# Altium PCB STM32.PcbDoc (part 6 of 10)
Units mil, origin at the board's own origin, x right, y up, seen from the top; angles counter-clockwise.
Board outline 3925 x 3925 mil, 2 copper layers (Top Layer, Bottom Layer); 152 components, 142 nets, 670 pads, 189 vias.
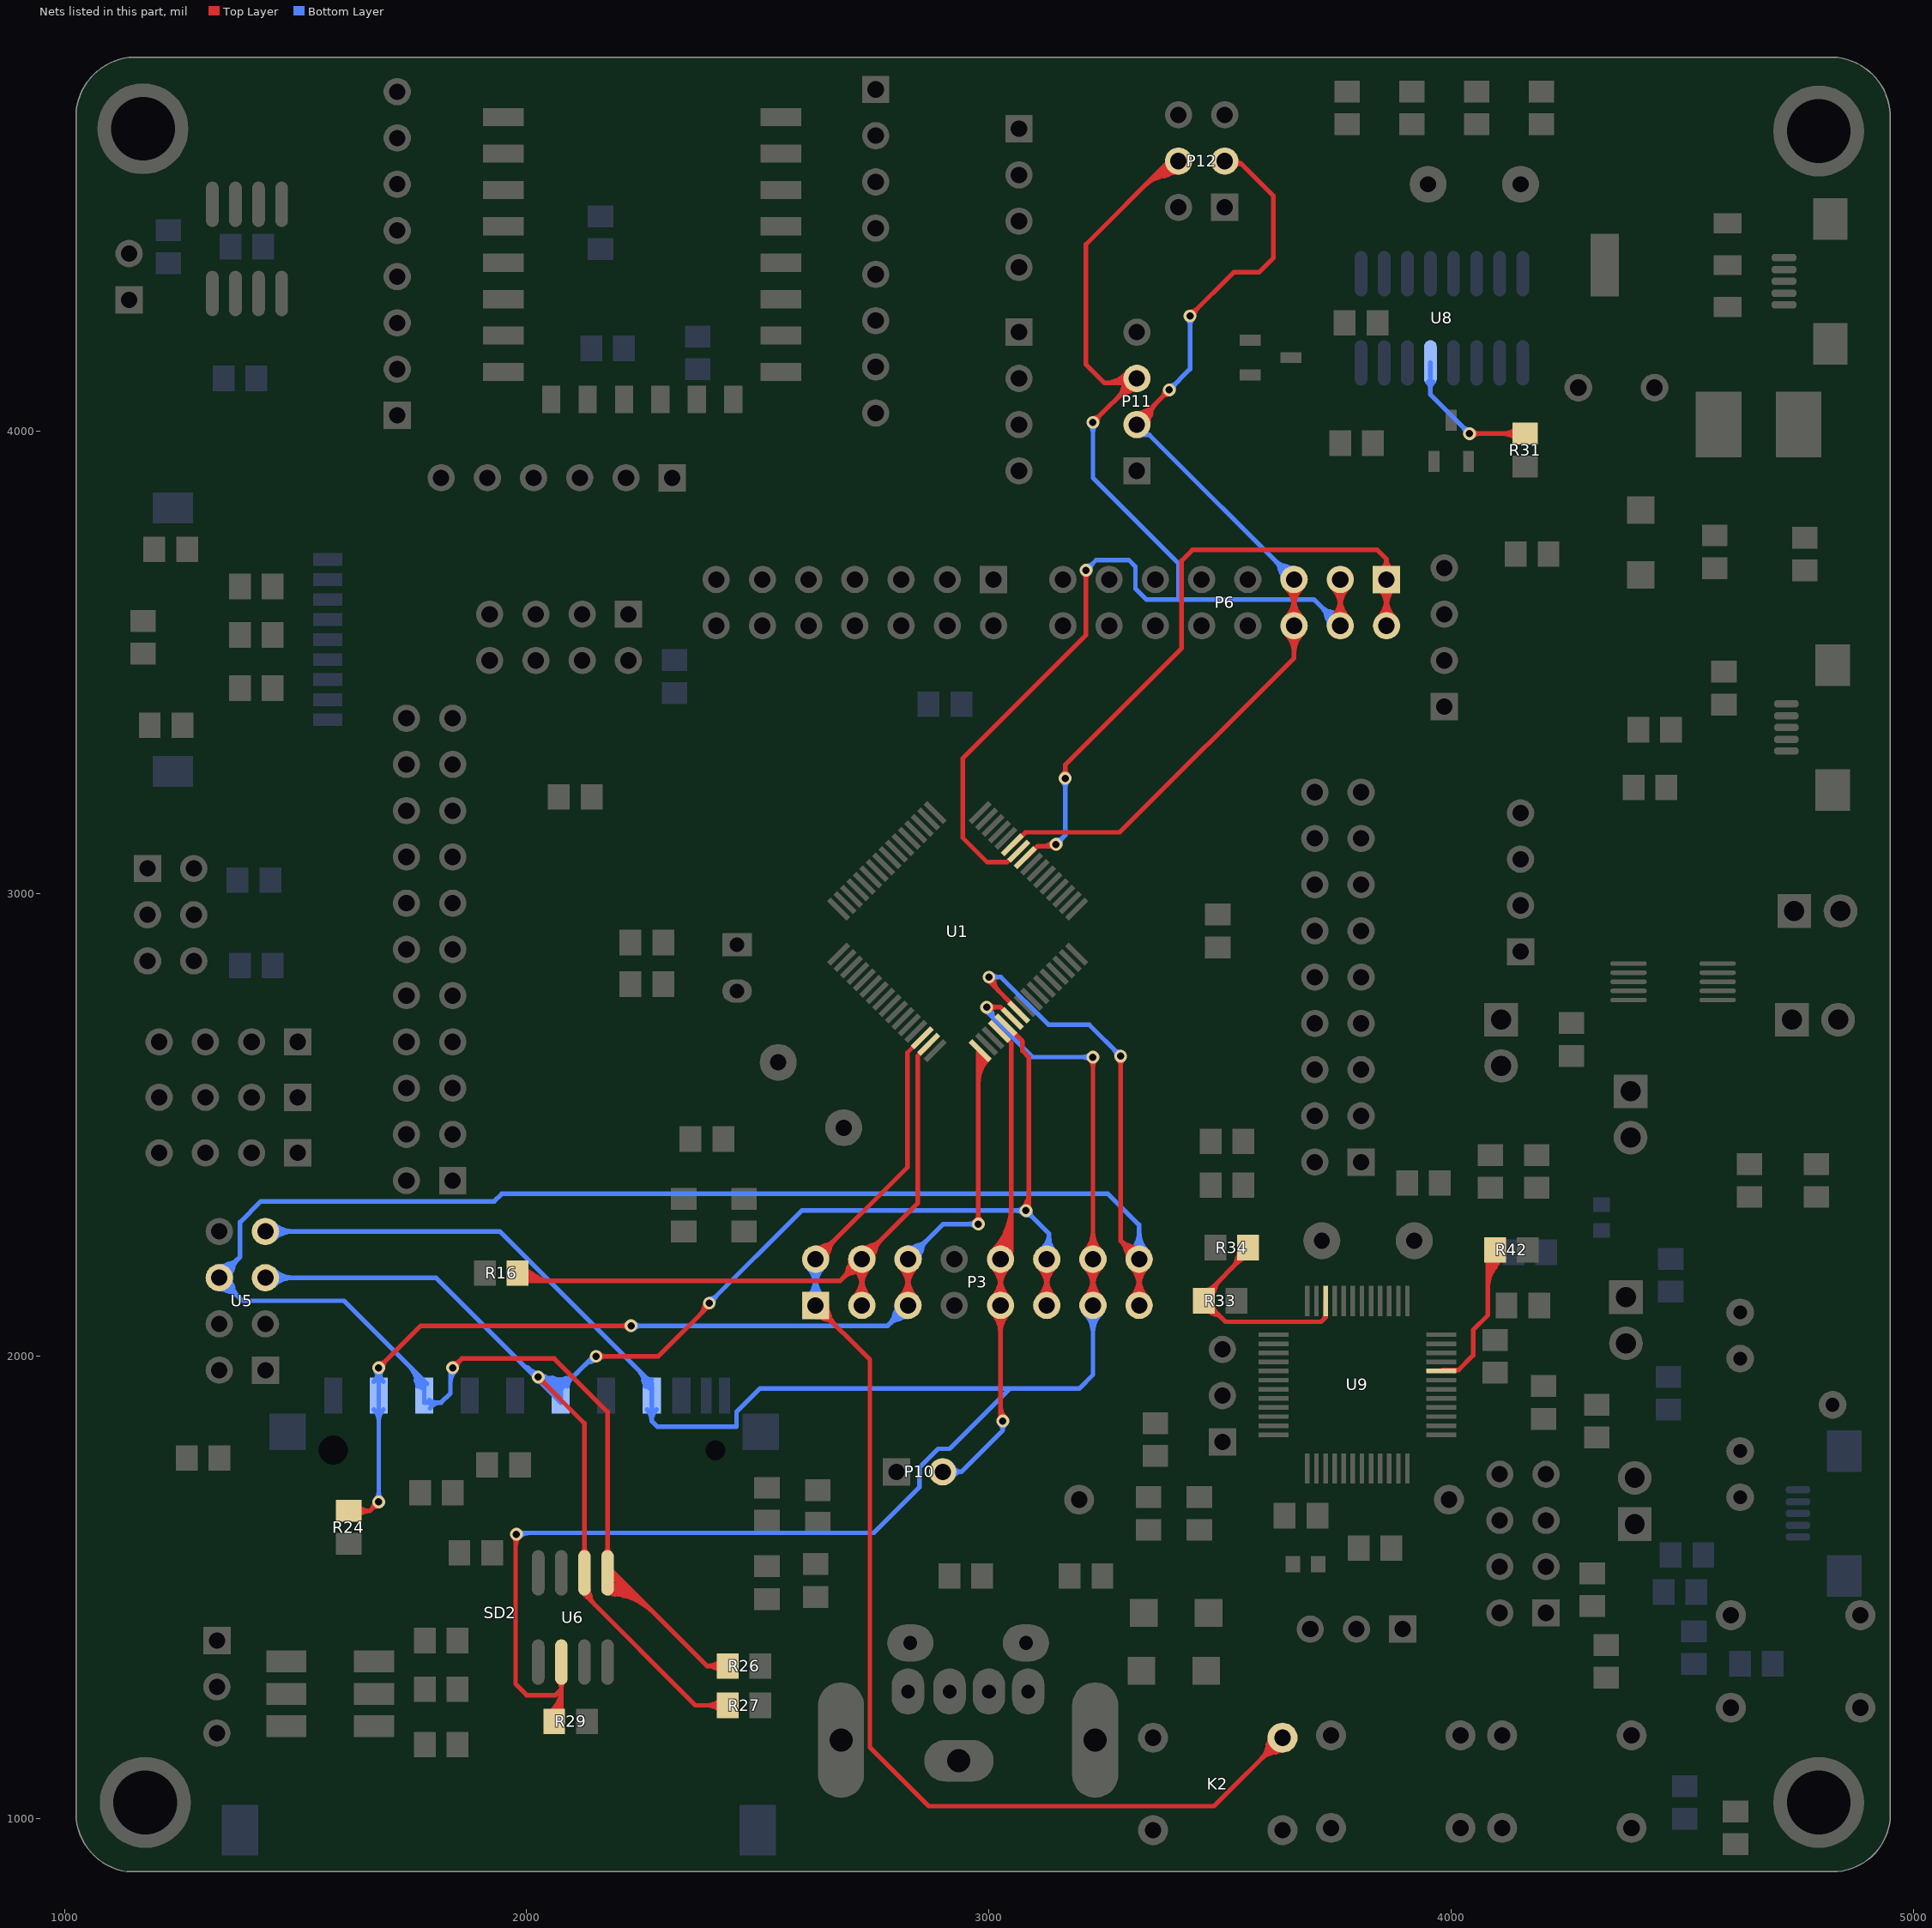
[diagram p6: the nets of this part, all layers, seen from the top]

## Via types
v1: diameter 27.56, hole 15.75, Top Layer to Bottom Layer, tented both sides, 185 vias
v2: diameter 39.37, hole 23.62, Top Layer to Bottom Layer, tented both sides, 3 vias
v3: diameter 39.37, hole 27.56, Top Layer to Bottom Layer, tented both sides, 1 vias

## Nets (pads, with @x,y where several pads share a name; then routed paths per layer and width w, separated by ;. In a path a pad name is that pad's centre, name@x,y a point inside that pad or via, vN(x,y) a via of type N, cw(c..) or ccw(c..) an arc to the next point about the centre after c; other vN are vias at no path point) (continued)
NetR31_2: R31.2 U8.13 | length 649.6
  Top Layer w10: v1(4039.57,3995.43) R31.2@4160,3995.43 ; 4060.76,3995.43 ccw(c4060.76,3974.24) 4045.77,3989.23 cw(c4060.76,3974.24) 4060.76,3995.43 ; 4060.76,3995.43 cw(c4060.76,4016.63) 4045.77,4001.64 ccw(c4060.76,4016.63) 4060.76,3995.43 ; 4111.11,3995.43 ccw(c4111.11,4040.39) 4142.9,4008.6 cw(c4111.11,4040.39) 4111.11,3995.43 ; 4111.11,3995.43 cw(c4111.11,3950.48) 4142.9,3982.27 ccw(c4111.11,3950.48) 4111.11,3995.43
  Bottom Layer w10: U8.13@3955,4148.54 3955,4080 v1(4039.57,3995.43) ; 3955,4091.92 ccw(c3933.8,4091.92) 3948.79,4106.9 cw(c3933.8,4091.92) 3955,4091.92 ; 3955,4091.92 cw(c3976.2,4091.92) 3961.21,4106.9 ccw(c3976.2,4091.92) 3955,4091.92 ; 4024.58,4010.42 ccw(c4039.57,4025.41) 4039.57,4004.21 cw(c4039.57,4025.41) 4024.58,4010.42 ; 4024.58,4010.42 cw(c4009.59,3995.43) 4030.79,3995.43 ccw(c4009.59,3995.43) 4024.58,4010.42
NetR33_1: R33.1 R34.2 U9.10 | length 1205.7
  Top Layer w10: R33.1@3463.25,2115.65 ccw(c3498.79,2126.84) 3489.15,2090.86 ; R33.1@3464.97,2122.62 ccw(c3454.08,2157.88) 3489.73,2148.33 ; 3535.28,2206.67 cw(c3570.92,2197.12) R34.2@3560.03,2232.38 ; R34.2@3560.43,2235 3560.43,2225.43 3464.57,2129.57 R33.1@3464.57,2120 3466.6,2120 3512.01,2074.6 3718.61,2074.6 3728.13,2084.11 U9.10@3728.13,2119.58 ; R33.1@3464.57,2097.44 cw(c3464.57,2038.07) 3506.55,2080.05 ccw(c3464.57,2038.07) R33.1@3464.57,2097.44 ; R33.1@3464.57,2107.44 cw(c3464.57,2072.21) 3489.48,2097.12 ccw(c3464.57,2072.21) R33.1@3464.57,2107.44 ; R33.1@3464.57,2142.56 ccw(c3464.57,2173.92) 3486.74,2151.75 cw(c3464.57,2173.92) R33.1@3464.57,2142.56 ; R33.1@3473.19,2123.94 cw(c3507.6,2123.94) 3483.27,2148.27 ccw(c3507.6,2123.94) R33.1@3473.19,2123.94 ; R33.1@3483.19,2116.06 ccw(c3513.73,2116.06) 3492.14,2094.47 cw(c3513.73,2116.06) R33.1@3483.19,2116.06 ; R33.1@3483.19,2123.94 cw(c3541.74,2123.94) 3500.34,2165.34 ccw(c3541.74,2123.94) R33.1@3483.19,2123.94 ; 3524.66,2189.66 ccw(c3483.26,2231.06) 3541.81,2231.06 cw(c3483.26,2231.06) 3524.66,2189.66 ; 3538.25,2203.25 cw(c3560.43,2181.07) 3560.43,2212.44 ccw(c3560.43,2181.07) 3538.25,2203.25 ; 3541.74,2206.73 ccw(c3517.41,2231.06) 3551.81,2231.06 cw(c3517.41,2231.06) 3541.74,2206.73 ; 3722.49,2078.48 ccw(c3708.89,2092.08) 3728.13,2092.08 cw(c3708.89,2092.08) 3722.49,2078.48
NetR42_2: R42.2 U9.44 | length 1452.4
  Top Layer w10: U9.44@3978.13,1968 3980.33,1970.21 4015.8,1970.21 4047.48,2001.89 4047.48,2056.74 4079.13,2088.4 ; 4079.13,2088.4 4079.13,2225 4079.13,2088.4 ; 4079.13,2143.85 cw(c4176.78,2143.85) R42.2@4107.73,2212.9 ; 4079.13,2143.85 cw(c4176.78,2143.85) R42.2@4107.73,2212.9 ; 4079.13,2143.85 cw(c4176.78,2143.85) R42.2@4107.73,2212.9 ; 4079.13,2143.85 cw(c4176.78,2143.85) R42.2@4107.73,2212.9 ; 4079.13,2167.99 cw(c4152.64,2167.99) R42.2@4100.66,2219.97 ; 4079.13,2167.99 cw(c4152.64,2167.99) R42.2@4100.66,2219.97 ; 4079.13,2167.99 cw(c4152.64,2167.99) R42.2@4100.66,2219.97 ; 4079.13,2167.99 cw(c4152.64,2167.99) R42.2@4100.66,2219.97 ; 4079.13,2192.13 cw(c4128.5,2192.13) R42.2@4093.59,2227.04 ; 4079.13,2192.13 cw(c4128.5,2192.13) R42.2@4093.59,2227.04 ; 4079.13,2192.13 cw(c4128.5,2192.13) R42.2@4093.59,2227.04 ; 4079.13,2192.13 cw(c4128.5,2192.13) R42.2@4093.59,2227.04 ; U9.44@4005.63,1968 cw(c4010.95,1962.67) 4010.95,1970.21 ccw(c4010.95,1962.67) U9.44@4005.63,1968 ; R42.2@4081.27,2213.02 cw(c4068.28,2200.28) 4084.04,2191.18 ccw(c4068.28,2200.28) R42.2@4081.27,2213.02 ; R42.2@4083.71,2210.94 cw(c4071.66,2194.16) 4089.17,2183.22 ccw(c4071.66,2194.16) R42.2@4083.71,2210.94 ; R42.2@4088.41,2220.02 cw(c4078.04,2209.85) 4090.62,2202.58 ccw(c4078.04,2209.85) R42.2@4088.41,2220.02 ; 4089.35,2200.38 cw(c4103.66,2192.12) 4099.39,2208.08 ccw(c4103.66,2192.12) 4089.35,2200.38 ; R42.2@4089.54,2219.06 cw(c4077.89,2202.84) 4094.82,2192.25 ccw(c4077.89,2202.84) R42.2@4089.54,2219.06 ; R42.2@4095.37,2227.18 cw(c4084.12,2211.52) 4100.47,2201.29 ccw(c4084.12,2211.52) R42.2@4095.37,2227.18
NIRQ: P3.3 P3.4 R16.2 U1.15 | length 3199.3
  Top Layer w10: R16.2@1979.29,2176.83 cw(c1995.04,2166.29) 2004.76,2182.56 ; R16.2@1980.43,2180 1990,2180 2007,2163 2678,2163 P3.4@2725,2210 ; R16.2@1987.6,2171.27 cw(c2003.8,2160.43) 2013.8,2177.17 ; R16.2@1995.01,2164.47 cw(c2005.19,2156.37) 2011.69,2167.63 ; R16.2@1995.91,2165.71 cw(c2012.56,2154.58) 2022.83,2171.77 ; R16.2@1998.42,2180.88 ccw(c2014.38,2185.16) 2006.12,2170.85 ; 2694.48,2187.65 cw(c2731.61,2177.7) P3.4@2723.9,2215.36 ; 2702.65,2179.48 ccw(c2692.7,2216.61) P3.4@2730.36,2208.9 ; P3.4@2719.64,2211.1 cw(c2757.3,2203.39) 2747.35,2240.52 ; P3.3@2725,2110 P3.4@2725,2210 ; P3.4@2726.1,2204.64 ccw(c2718.39,2242.3) 2755.52,2232.35 ; U1.15@2869.87,2675.13 2869.87,2673.43 2845.86,2649.41 2845.86,2330.86 P3.4@2725,2210 ; 2683.13,2168.13 ccw(c2641.26,2210) 2700.47,2210 cw(c2641.26,2210) 2683.13,2168.13 ; 2683.13,2168.13 cw(c2725,2126.26) 2725,2185.47 ccw(c2725,2126.26) 2683.13,2168.13 ; 2700.2,2185.2 ccw(c2675.4,2210) 2710.47,2210 cw(c2675.4,2210) 2700.2,2185.2 ; 2700.2,2185.2 cw(c2725,2160.4) 2725,2195.47 ccw(c2725,2160.4) 2700.2,2185.2 ; 2725,2145.07 ccw(c2760.07,2145.07) 2735.27,2120.27 cw(c2760.07,2145.07) 2725,2145.07 ; 2725,2145.07 cw(c2689.93,2145.07) 2714.73,2120.27 ccw(c2689.93,2145.07) 2725,2145.07 ; 2725,2150.79 ccw(c2665.79,2150.79) 2707.66,2192.66 cw(c2665.79,2150.79) 2725,2150.79 ; 2725,2150.79 cw(c2784.21,2150.79) 2742.34,2192.66 ccw(c2784.21,2150.79) 2725,2150.79 ; 2725,2169.21 ccw(c2784.21,2169.21) 2742.34,2127.34 cw(c2784.21,2169.21) 2725,2169.21 ; 2725,2169.21 cw(c2665.79,2169.21) 2707.66,2127.34 ccw(c2665.79,2169.21) 2725,2169.21 ; 2725,2174.93 ccw(c2689.93,2174.93) 2714.73,2199.73 cw(c2689.93,2174.93) 2725,2174.93 ; 2725,2174.93 cw(c2760.07,2174.93) 2735.27,2199.73 ccw(c2760.07,2174.93) 2725,2174.93 ; 2749.8,2234.8 ccw(c2774.6,2210) 2739.53,2210 cw(c2774.6,2210) 2749.8,2234.8 ; 2749.8,2234.8 cw(c2725,2259.6) 2725,2224.53 ccw(c2725,2259.6) 2749.8,2234.8 ; 2766.87,2251.87 ccw(c2808.74,2210) 2749.53,2210 cw(c2808.74,2210) 2766.87,2251.87 ; 2766.87,2251.87 cw(c2725,2293.74) 2725,2234.53 ccw(c2725,2293.74) 2766.87,2251.87 ; R16.2@1979.46,2175.09 ccw(c2008.64,2204.27) 2008.64,2163 cw(c2008.64,2204.27) R16.2@1979.46,2175.09 ; R16.2@1986.53,2182.16 ccw(c2032.79,2228.42) 2032.79,2163 cw(c2032.79,2228.42) R16.2@1986.53,2182.16 ; R16.2@1993.6,2189.23 ccw(c2056.93,2252.56) 2056.93,2163 cw(c2056.93,2252.56) R16.2@1993.6,2189.23 ; R16.2@1999.06,2176.06 ccw(c2011.41,2176.06) 2002.68,2167.32 cw(c2011.41,2176.06) R16.2@1999.06,2176.06
PA0: K2.2 P3.1 P3.2 U1.14 | length 4568.8
  Top Layer w10: P3.1@2619.64,2108.9 ccw(c2657.3,2116.61) 2647.35,2079.48 ; P3.2@2619.64,2211.1 cw(c2657.3,2203.39) 2647.35,2240.52 ; P3.1@2625,2110 2742.48,1992.52 2742.48,1154 2869.48,1027 3487,1027 K2.2@3635,1175 ; P3.2@2625,2210 2823.74,2408.74 2823.74,2656.84 U1.14@2855.95,2689.05 ; P3.1@2626.1,2115.36 cw(c2618.39,2077.7) 2655.52,2087.65 ; P3.2@2626.1,2204.64 ccw(c2618.39,2242.3) 2655.52,2232.35 ; 3599.22,1144.18 cw(c3643.76,1132.25) K2.2@3634.51,1177.42 ; 3603.41,1159.81 cw(c3640.13,1149.98) K2.2@3632.5,1187.22 ; 3604.19,1139.22 ccw(c3592.25,1183.75) K2.2@3637.42,1174.5 ; 3619.82,1143.4 ccw(c3609.98,1180.12) K2.2@3647.22,1172.5 ; P3.1@2649.8,2085.2 ccw(c2625,2060.4) 2625,2095.47 cw(c2625,2060.4) P3.1@2649.8,2085.2 ; P3.1@2649.8,2085.2 cw(c2674.6,2110) 2639.53,2110 ccw(c2674.6,2110) P3.1@2649.8,2085.2 ; 2649.8,2234.8 ccw(c2674.6,2210) 2639.53,2210 cw(c2674.6,2210) 2649.8,2234.8 ; 2649.8,2234.8 cw(c2625,2259.6) 2625,2224.53 ccw(c2625,2259.6) 2649.8,2234.8 ; 2666.87,2068.13 ccw(c2625,2026.26) 2625,2085.47 cw(c2625,2026.26) 2666.87,2068.13 ; 2666.87,2068.13 cw(c2708.74,2110) 2649.53,2110 ccw(c2708.74,2110) 2666.87,2068.13 ; 2666.87,2251.87 ccw(c2708.74,2210) 2649.53,2210 cw(c2708.74,2210) 2666.87,2251.87 ; 2666.87,2251.87 cw(c2625,2293.74) 2625,2234.53 ccw(c2625,2293.74) 2666.87,2251.87 ; 3588.01,1128.01 ccw(c3541.02,1175) 3607.47,1175 cw(c3541.02,1175) 3588.01,1128.01 ; 3588.01,1128.01 cw(c3635,1081.02) 3635,1147.47 ccw(c3635,1081.02) 3588.01,1128.01 ; 3605.08,1145.08 ccw(c3575.16,1175) 3617.47,1175 cw(c3575.16,1175) 3605.08,1145.08 ; 3605.08,1145.08 cw(c3635,1115.16) 3635,1157.47 ccw(c3635,1115.16) 3605.08,1145.08
  Bottom Layer w10: P3.1@2625,2110 P3.2@2625,2210 ; 2625,2145.07 ccw(c2660.07,2145.07) 2635.27,2120.27 cw(c2660.07,2145.07) 2625,2145.07 ; 2625,2145.07 cw(c2589.93,2145.07) 2614.73,2120.27 ccw(c2589.93,2145.07) 2625,2145.07 ; 2625,2150.79 ccw(c2565.79,2150.79) 2607.66,2192.66 cw(c2565.79,2150.79) 2625,2150.79 ; 2625,2150.79 cw(c2684.21,2150.79) 2642.34,2192.66 ccw(c2684.21,2150.79) 2625,2150.79 ; 2625,2169.21 ccw(c2684.21,2169.21) 2642.34,2127.34 cw(c2684.21,2169.21) 2625,2169.21 ; 2625,2169.21 cw(c2565.79,2169.21) 2607.66,2127.34 ccw(c2565.79,2169.21) 2625,2169.21 ; 2625,2174.93 ccw(c2589.93,2174.93) 2614.73,2199.73 cw(c2589.93,2174.93) 2625,2174.93 ; 2625,2174.93 cw(c2660.07,2174.93) 2635.27,2199.73 ccw(c2660.07,2174.93) 2625,2174.93
PA3: P3.5 P3.6 R24.2 SD2.1 U1.17 | length 4991.7
  Top Layer w10: R24.2@1615,1665.43 1660.43,1665.43 ; 1668.77,1675.85 cw(c1682.64,1672.13) v1@1679.76,1686.2 ; 1670.85,1673.77 ccw(c1667.13,1687.64) v1@1681.2,1684.76 ; v1@1678.8,1975.24 cw(c1692.87,1972.36) 1689.15,1986.23 ; v1(1680,1685) 1660.43,1665.43 ; v1(1680,1975) 1771,2066 v1(2226,2066) ; v1@1680.24,1973.8 ccw(c1677.36,1987.87) 1691.23,1984.15 ; P3.5@2825,2110 P3.6@2825,2210 ; v1(2977,2286) 2977,2656.98 U1.17@2981.23,2661.21 ; 2979.3,2648.21 ccw(c2966.54,2655.57) U1.17@2980.29,2660.85 ; 1660.43,1665.43 ccw(c1660.43,1628.51) 1632.85,1653.06 cw(c1660.43,1628.51) 1660.43,1665.43 ; 1660.43,1665.43 cw(c1660.43,1702.35) 1632.85,1677.81 ccw(c1660.43,1702.35) 1660.43,1665.43 ; 1665.01,1670.01 ccw(c1650.02,1685) 1671.22,1685 cw(c1650.02,1685) 1665.01,1670.01 ; 1665.01,1670.01 cw(c1680,1655.02) 1680,1676.22 ccw(c1680,1655.02) 1665.01,1670.01 ; 1694.99,1989.99 ccw(c1709.98,1975) 1688.78,1975 cw(c1709.98,1975) 1694.99,1989.99 ; 1694.99,1989.99 cw(c1680,2004.98) 1680,1983.78 ccw(c1680,2004.98) 1694.99,1989.99 ; 2204.8,2066 ccw(c2204.8,2087.2) 2219.79,2072.21 cw(c2204.8,2087.2) 2204.8,2066 ; 2204.8,2066 cw(c2204.8,2044.8) 2219.79,2059.79 ccw(c2204.8,2044.8) 2204.8,2066 ; 2825,2145.07 ccw(c2860.07,2145.07) 2835.27,2120.27 cw(c2860.07,2145.07) 2825,2145.07 ; 2825,2145.07 cw(c2789.93,2145.07) 2814.73,2120.27 ccw(c2789.93,2145.07) 2825,2145.07 ; 2825,2150.79 ccw(c2765.79,2150.79) 2807.66,2192.66 cw(c2765.79,2150.79) 2825,2150.79 ; 2825,2150.79 cw(c2884.21,2150.79) 2842.34,2192.66 ccw(c2884.21,2150.79) 2825,2150.79 ; 2825,2169.21 ccw(c2884.21,2169.21) 2842.34,2127.34 cw(c2884.21,2169.21) 2825,2169.21 ; 2825,2169.21 cw(c2765.79,2169.21) 2807.66,2127.34 ccw(c2765.79,2169.21) 2825,2169.21 ; 2825,2174.93 ccw(c2789.93,2174.93) 2814.73,2199.73 cw(c2789.93,2174.93) 2825,2174.93 ; 2825,2174.93 cw(c2860.07,2174.93) 2835.27,2199.73 ccw(c2860.07,2174.93) 2825,2174.93 ; 2977,2307.2 ccw(c2998.2,2307.2) 2983.21,2292.21 cw(c2998.2,2307.2) 2977,2307.2 ; 2977,2307.2 cw(c2955.8,2307.2) 2970.79,2292.21 ccw(c2955.8,2307.2) 2977,2307.2 ; 2977,2590.65 cw(c3051.79,2590.65) 2998.91,2643.53 ccw(c3051.79,2590.65) 2977,2590.65 ; 2977,2614.79 cw(c3027.65,2614.79) 2991.83,2650.6 ccw(c3027.65,2614.79) 2977,2614.79 ; 2977,2638.93 cw(c3003.51,2638.93) 2984.76,2657.67 ccw(c3003.51,2638.93) 2977,2638.93
  Bottom Layer w10: SD2.1@1673.8,1948 ccw(c1668.5,1959.37) 1680.62,1956.12 ccw(c1686.63,1954.51) SD2.1@1684.66,1948.61 ; SD2.1@1675.34,1948.61 ccw(c1673.37,1954.51) 1679.38,1956.12 ccw(c1691.5,1959.37) SD2.1@1686.2,1948 ; v1(1680,1685) 1680,1900 v1(1680,1975) ; v1(2226,2066) 2781,2066 P3.5@2825,2110 ; 2794.48,2087.65 cw(c2831.61,2077.7) P3.5@2823.9,2115.36 ; 2802.65,2079.48 ccw(c2792.7,2116.61) P3.5@2830.36,2108.9 ; P3.6@2819.64,2211.1 cw(c2857.3,2203.39) 2847.35,2240.52 ; P3.6@2825,2210 2901,2286 v1(2977,2286) ; P3.6@2826.1,2204.64 ccw(c2818.39,2242.3) 2855.52,2232.35 ; v1@1672.93,1969.79 cw(c1658.5,1959.16) 1675.81,1954.52 ; v1@1672.93,1969.79 cw(c1658.5,1959.16) 1675.81,1954.52 ; v1@1672.93,1969.79 cw(c1658.5,1959.16) 1675.81,1954.52 ; v1@1675.61,1967.4 cw(c1667.16,1952.76) 1683.48,1957.14 ; v1@1675.61,1967.4 cw(c1667.16,1952.76) 1683.48,1957.14 ; v1@1675.61,1967.4 cw(c1667.16,1952.76) 1683.48,1957.14 ; 1676.52,1957.14 cw(c1692.84,1952.76) v1@1684.39,1967.4 ; 1676.52,1957.14 cw(c1692.84,1952.76) v1@1684.39,1967.4 ; 1676.52,1957.14 cw(c1692.84,1952.76) v1@1684.39,1967.4 ; 1680,1706.2 ccw(c1701.2,1706.2) 1686.21,1691.21 cw(c1701.2,1706.2) 1680,1706.2 ; 1680,1706.2 cw(c1658.8,1706.2) 1673.79,1691.21 ccw(c1658.8,1706.2) 1680,1706.2 ; 1680,1859.86 ccw(c1644.55,1859.86) 1669.62,1884.93 cw(c1644.55,1859.86) 1680,1859.86 ; 1680,1859.86 cw(c1715.45,1859.86) 1690.38,1884.93 ccw(c1715.45,1859.86) 1680,1859.86 ; SD2.1@1680,1953.8 ccw(c1658.8,1953.8) 1673.79,1968.79 cw(c1658.8,1953.8) SD2.1@1680,1953.8 ; SD2.1@1680,1953.8 cw(c1701.2,1953.8) 1686.21,1968.79 ccw(c1701.2,1953.8) SD2.1@1680,1953.8 ; v1@1680,1970.14 ccw(c1715.45,1970.14) 1690.38,1945.07 cw(c1715.45,1970.14) v1@1680,1970.14 ; v1@1680,1970.14 cw(c1644.55,1970.14) 1669.62,1945.07 ccw(c1644.55,1970.14) v1@1680,1970.14 ; 1684.19,1954.52 cw(c1701.5,1959.16) v1@1687.07,1969.79 ; 1684.19,1954.52 cw(c1701.5,1959.16) v1@1687.07,1969.79 ; 1684.19,1954.52 cw(c1701.5,1959.16) v1@1687.07,1969.79 ; 2247.2,2066 ccw(c2247.2,2044.8) 2232.21,2059.79 cw(c2247.2,2044.8) 2247.2,2066 ; 2247.2,2066 cw(c2247.2,2087.2) 2232.21,2072.21 ccw(c2247.2,2087.2) 2247.2,2066 ; 2783.13,2068.13 ccw(c2741.26,2110) 2800.47,2110 cw(c2741.26,2110) 2783.13,2068.13 ; 2783.13,2068.13 cw(c2825,2026.26) 2825,2085.47 ccw(c2825,2026.26) 2783.13,2068.13 ; 2800.2,2085.2 ccw(c2775.4,2110) 2810.47,2110 cw(c2775.4,2110) 2800.2,2085.2 ; 2800.2,2085.2 cw(c2825,2060.4) 2825,2095.47 ccw(c2825,2060.4) 2800.2,2085.2 ; 2849.8,2234.8 ccw(c2874.6,2210) 2839.53,2210 cw(c2874.6,2210) 2849.8,2234.8 ; 2849.8,2234.8 cw(c2825,2259.6) 2825,2224.53 ccw(c2825,2259.6) 2849.8,2234.8 ; 2866.87,2251.87 ccw(c2908.74,2210) 2849.53,2210 cw(c2908.74,2210) 2866.87,2251.87 ; 2866.87,2251.87 cw(c2825,2293.74) 2825,2234.53 ccw(c2825,2293.74) 2866.87,2251.87 ; 2955.8,2286 ccw(c2955.8,2307.2) 2970.79,2292.21 cw(c2955.8,2307.2) 2955.8,2286 ; 2955.8,2286 cw(c2955.8,2264.8) 2970.79,2279.79 ccw(c2955.8,2264.8) 2955.8,2286
PA4: P3.9 P3.10 P10.2 U1.20 | length 3699.3
  Top Layer w10: P3.10@3019.85,2233.98 ccw(c3012.13,2269.86) 3043.92,2251.51 ccw(c3066.08,2238.71) P3.10@3045.1,2224.05 ; U1.20@3022.99,2702.97 3048.26,2677.69 3048.26,2233.26 ; 3032.42,2249.51 ccw(c3053.41,2236.81) P3.10@3035.57,2219.97 ; P3.10@3033.15,2233.13 ccw(c3037.14,2244.44) 3047.53,2238.45 ccw(c3063.62,2229.16) P3.10@3046.97,2220.9 ; 3036.06,2237.9 ccw(c3051.87,2228.78) P3.10@3036.91,2218.32 ; 3039.22,2260.76 ccw(c3063.33,2246.17) P3.10@3042.84,2226.84 ; P3.9@3007.66,2092.66 cw(c2965.79,2050.79) 3025,2050.79 ; P3.9@3007.66,2092.66 cw(c2965.79,2050.79) 3025,2050.79 ; P3.9@3007.66,2092.66 cw(c2965.79,2050.79) 3025,2050.79 ; P3.9@3007.66,2092.66 cw(c2965.79,2050.79) 3025,2050.79 ; P3.9@3014.73,2099.73 cw(c2989.93,2074.93) 3025,2074.93 ; P3.9@3014.73,2099.73 cw(c2989.93,2074.93) 3025,2074.93 ; P3.9@3014.73,2099.73 cw(c2989.93,2074.93) 3025,2074.93 ; P3.9@3014.73,2099.73 cw(c2989.93,2074.93) 3025,2074.93 ; 3025,1893.27 ccw(c3063.27,1893.27) v1@3036.21,1866.21 ; 3025,1893.27 ccw(c3063.27,1893.27) v1@3036.21,1866.21 ; 3025,1893.27 ccw(c3063.27,1893.27) v1@3036.21,1866.21 ; 3025,1893.27 ccw(c3063.27,1893.27) v1@3036.21,1866.21 ; 3025,2050.79 cw(c3084.21,2050.79) P3.9@3042.34,2092.66 ; 3025,2050.79 cw(c3084.21,2050.79) P3.9@3042.34,2092.66 ; 3025,2050.79 cw(c3084.21,2050.79) P3.9@3042.34,2092.66 ; 3025,2050.79 cw(c3084.21,2050.79) P3.9@3042.34,2092.66 ; 3025,2074.93 cw(c3060.07,2074.93) P3.9@3035.27,2099.73 ; 3025,2074.93 cw(c3060.07,2074.93) P3.9@3035.27,2099.73 ; 3025,2074.93 cw(c3060.07,2074.93) P3.9@3035.27,2099.73 ; 3025,2074.93 cw(c3060.07,2074.93) P3.9@3035.27,2099.73 ; P3.9@3025,2110 3025,1860 P3.9@3025,2110 ; P3.9@3025,2110 P3.10@3025,2210 3048.26,2233.26 ; 3025,2145.07 ccw(c3060.07,2145.07) 3035.27,2120.27 cw(c3060.07,2145.07) 3025,2145.07 ; 3025,2145.07 cw(c2989.93,2145.07) 3014.73,2120.27 ccw(c2989.93,2145.07) 3025,2145.07 ; 3025,2150.79 ccw(c2965.79,2150.79) 3007.66,2192.66 cw(c2965.79,2150.79) 3025,2150.79 ; 3025,2150.79 cw(c3084.21,2150.79) 3042.34,2192.66 ccw(c3084.21,2150.79) 3025,2150.79 ; 3025,2169.21 ccw(c3084.21,2169.21) 3042.34,2127.34 cw(c3084.21,2169.21) 3025,2169.21 ; 3025,2169.21 cw(c2965.79,2169.21) 3007.66,2127.34 ccw(c2965.79,2169.21) 3025,2169.21 ; 3025,2174.93 ccw(c2989.93,2174.93) 3014.73,2199.73 cw(c2989.93,2174.93) 3025,2174.93 ; 3025,2174.93 cw(c3060.07,2174.93) 3035.27,2199.73 ccw(c3060.07,2174.93) 3025,2174.93 ; 3048.26,2233.26 ccw(c3055.18,2226.34) 3046.57,2221.68 cw(c3055.18,2226.34) 3048.26,2233.26 ; 3048.26,2233.26 cw(c3041.34,2240.18) 3036.68,2231.57 ccw(c3041.34,2240.18) 3048.26,2233.26 ; P3.10@3007.66,2227.34 ccw(c2909.64,2325.36) 3048.26,2325.36 cw(c2909.64,2325.36) P3.10@3007.66,2227.34 ; P3.10@3014.73,2220.27 ccw(c2933.78,2301.22) 3048.26,2301.22 cw(c2933.78,2301.22) P3.10@3014.73,2220.27 ; P3.10@3021.8,2213.2 ccw(c2957.92,2277.08) 3048.26,2277.08 cw(c2957.92,2277.08) P3.10@3021.8,2213.2 ; P3.10@3028.87,2206.13 ccw(c2982.06,2252.94) 3048.26,2252.94 cw(c2982.06,2252.94) P3.10@3028.87,2206.13 ; P3.10@3035.94,2199.06 ccw(c3006.2,2228.8) 3048.26,2228.8 cw(c3006.2,2228.8) P3.10@3035.94,2199.06
  Bottom Layer w10: P10.2@2900,1750 2940,1750 ; v1(3030,1860) 3030,1840 ; 2940,1750 ccw(c2940,1729.65) 2921.86,1738.88 cw(c2940,1729.65) 2940,1750 ; 2940,1750 cw(c2940,1770.35) 2921.86,1761.12 ccw(c2940,1770.35) 2940,1750 ; 2940,1750 3030,1840 ; 3030,1840 ccw(c3011.61,1840) 3024.06,1853.54 cw(c3011.61,1840) 3030,1840 ; 3030,1840 cw(c3048.39,1840) 3035.94,1853.54 ccw(c3048.39,1840) 3030,1840
PA5: P3.11 P3.12 R27.2 SD2.5 U1.21 U5.5 U6.6 | length 7198.3
  Top Layer w10: v1@2023.8,1954.76 ccw(c2037.87,1957.64) 2034.15,1943.77 ; v1(2025,1955) 2125,1855 U6.6@2125,1531.46 2125,1485 2365,1245 R27.2@2434.57,1245 ; v1@2025.24,1956.2 cw(c2022.36,1942.13) 2036.23,1945.85 ; U6.6@2125.61,1497.08 cw(c2112.6,1474.56) 2137.73,1481.29 ; v1(2150,2000) 2285,2000 v1@2395,2110 ; 2383.09,2103.31 cw(c2401.52,2098.37) v1@2394.55,2116.14 ; U1.21@3036.91,2716.89 3072.52,2681.28 3072.52,2660.64 3086,2647.16 v1@3086,2325 ; 3082.13,2335.65 ccw(c3091.01,2330.53) v1@3085.08,2322.16 ; P3.11@3125,2110 P3.12@3125,2210 ; 2039.99,1940.01 ccw(c2025,1925.02) 2025,1946.22 cw(c2025,1925.02) 2039.99,1940.01 ; 2039.99,1940.01 cw(c2054.98,1955) 2033.78,1955 ccw(c2054.98,1955) 2039.99,1940.01 ; 2125,1588.08 ccw(c2146.19,1588.08) 2131.21,1573.1 cw(c2146.19,1588.08) 2125,1588.08 ; 2125,1588.08 cw(c2103.8,1588.08) 2118.79,1573.1 ccw(c2103.8,1588.08) 2125,1588.08 ; 2171.2,2000 ccw(c2171.2,1978.8) 2156.21,1993.79 cw(c2171.2,1978.8) 2171.2,2000 ; 2171.2,2000 cw(c2171.2,2021.2) 2156.21,2006.21 ccw(c2171.2,2021.2) 2171.2,2000 ; 2389.61,1245 ccw(c2389.61,1289.96) 2421.4,1258.17 cw(c2389.61,1289.96) 2389.61,1245 ; 2389.61,1245 cw(c2389.61,1200.04) 2421.4,1231.83 ccw(c2389.61,1200.04) 2389.61,1245 ; 3125,2145.07 ccw(c3160.07,2145.07) 3135.27,2120.27 cw(c3160.07,2145.07) 3125,2145.07 ; 3125,2145.07 cw(c3089.93,2145.07) 3114.73,2120.27 ccw(c3089.93,2145.07) 3125,2145.07 ; 3125,2150.79 ccw(c3065.79,2150.79) 3107.66,2192.66 cw(c3065.79,2150.79) 3125,2150.79 ; 3125,2150.79 cw(c3184.21,2150.79) 3142.34,2192.66 ccw(c3184.21,2150.79) 3125,2150.79 ; 3125,2169.21 ccw(c3184.21,2169.21) 3142.34,2127.34 cw(c3184.21,2169.21) 3125,2169.21 ; 3125,2169.21 cw(c3065.79,2169.21) 3107.66,2127.34 ccw(c3065.79,2169.21) 3125,2169.21 ; 3125,2174.93 ccw(c3089.93,2174.93) 3114.73,2199.73 cw(c3089.93,2174.93) 3125,2174.93 ; 3125,2174.93 cw(c3160.07,2174.93) 3135.27,2199.73 ccw(c3160.07,2174.93) 3125,2174.93 ; U6.6@2123.78,1496.02 ccw(c2147.44,1496.02) 2130.71,1479.29 cw(c2147.44,1496.02) U6.6@2123.78,1496.02 ; U6.6@2133.78,1496.02 ccw(c2181.58,1496.02) 2147.78,1462.22 cw(c2181.58,1496.02) U6.6@2133.78,1496.02 ; 2376.48,2091.48 ccw(c2352.95,2115) 2386.22,2115 cw(c2352.95,2115) 2376.48,2091.48 ; v1@3073.79,2321.21 ccw(c3044.32,2350.68) 3086,2350.68 cw(c3044.32,2350.68) v1@3073.79,2321.21
  Bottom Layer w10: U5.5@1435,2170 1803.7,2170 2073.7,1900 2073.7,1928.7 v1@2145,2000 ; 2012.48,1961.63 ccw(c2024.88,1967.51) v1@2025.01,1953.78 ; 2012.65,1967.09 cw(c2007.35,1947.32) v1@2026.12,1955.49 ; v1@2024.88,1956.21 cw(c2026.18,1942.64) 2037.99,1949.46 ; v1@2025.49,1956.12 cw(c2017.32,1937.35) 2037.09,1942.65 ; v1@2025.84,1946.26 cw(c2027.81,1925.62) 2045.77,1935.99 ; v1@2027.27,1946.52 cw(c2031.98,1928.93) 2041.09,1944.7 ; v1@2028.5,1946.95 cw(c2041.19,1917.76) SD2.5@2055.66,1946.11 ; v1@2030.07,1951.06 cw(c2016.9,1901.89) 2060.98,1927.34 ccw(c2045.46,1918.38) 2050.1,1935.69 ; v1@2030.95,1948.54 cw(c2036.71,1942.29) 2042.96,1948.06 ; v1@2031.73,1958.33 cw(c2019.13,1899.31) SD2.5@2069.77,1932.14 ; 2043.11,1951.63 cw(c2044.44,1903.75) SD2.5@2077.35,1938.55 ; 2044.75,1942.59 cw(c2056.84,1963.53) v1@2033.48,1957.27 ; 2046.84,1936.57 ccw(c2050.16,1948.98) SD2.5@2061.15,1942.31 ; 2051.18,1945.4 ccw(c2056.36,1964.72) SD2.5@2066.36,1947.4 ; 2053.39,1944.81 cw(c2046.47,1918.96) SD2.5@2069.64,1932.34 ; SD2.5@2055.34,1953.29 cw(c2047.78,1917.88) SD2.5@2078.16,1937.58 ; SD2.5@2068.67,1936.41 cw(c2092.68,1928.18) SD2.5@2086.11,1952.7 ; 2138.31,1988.09 ccw(c2133.37,2006.52) v1@2151.14,1999.55 ; v1(2395,2115) 2595,2315 v1(3080,2315) 3130,2265 ; P3.12@3125,2210 3130,2215 3130,2265 ; 1470.07,2170 ccw(c1470.07,2134.93) 1445.27,2159.73 cw(c1470.07,2134.93) 1470.07,2170 ; 1470.07,2170 cw(c1470.07,2205.07) 1445.27,2180.27 ccw(c1470.07,2205.07) 1470.07,2170 ; 1494.21,2170 ccw(c1494.21,2110.79) 1452.34,2152.66 cw(c1494.21,2110.79) 1494.21,2170 ; 1494.21,2170 cw(c1494.21,2229.21) 1452.34,2187.34 ccw(c1494.21,2229.21) 1494.21,2170 ; 2002.12,1975.5 cw(c1982.59,1947.26) v1@2016.36,1953.42 ; 2002.12,1975.5 cw(c1982.59,1947.26) v1@2016.36,1953.42 ; 2002.12,1975.5 cw(c1982.59,1947.26) v1@2016.36,1953.42 ; 2006.84,1966.93 ccw(c2018.34,1981.56) v1@2022.86,1963.52 ; 2006.84,1966.93 ccw(c2018.34,1981.56) v1@2022.86,1963.52 ; 2006.84,1966.93 ccw(c2018.34,1981.56) v1@2022.86,1963.52 ; 2010.69,1963.91 cw(c2001.47,1952.18) v1@2016.28,1953.95 ; 2010.69,1963.91 cw(c2001.47,1952.18) v1@2016.28,1953.95 ; 2010.69,1963.91 cw(c2001.47,1952.18) v1@2016.28,1953.95 ; v1@2029.09,1947.23 cw(c2035.92,1934.23) 2040.28,1948.26 ; v1@2029.09,1947.23 cw(c2035.92,1934.23) 2040.28,1948.26 ; v1@2029.09,1947.23 cw(c2035.92,1934.23) 2040.28,1948.26 ; v1@2029.6,1947.52 cw(c2049.15,1915.73) SD2.5@2057.81,1952.04 ; v1@2029.6,1947.52 cw(c2049.15,1915.73) SD2.5@2057.81,1952.04 ; v1@2029.6,1947.52 cw(c2049.15,1915.73) SD2.5@2057.81,1952.04 ; v1@2032.77,1959.09 ccw(c2057.29,1971.98) 2049.07,1945.52 ; v1@2032.77,1959.09 ccw(c2057.29,1971.98) 2049.07,1945.52 ; v1@2032.77,1959.09 ccw(c2057.29,1971.98) 2049.07,1945.52 ; v1@2033.48,1957.27 ccw(c2070.21,1967.11) 2051.2,1934.18 ; v1@2033.48,1957.27 ccw(c2070.21,1967.11) 2051.2,1934.18 ; v1@2033.48,1957.27 ccw(c2070.21,1967.11) 2051.2,1934.18 ; SD2.5@2073.7,1939.37 ccw(c2073.7,1965.13) 2091.91,1946.91 cw(c2073.7,1965.13) SD2.5@2073.7,1939.37 ; SD2.5@2073.7,1939.37 cw(c2073.7,2034.42) 2006.49,1967.21 ccw(c2073.7,2034.42) SD2.5@2073.7,1939.37 ; SD2.5@2073.7,1949.37 ccw(c2073.7,1999.27) 2108.99,1963.99 cw(c2073.7,1999.27) SD2.5@2073.7,1949.37 ; SD2.5@2073.7,1949.37 cw(c2073.7,2068.56) 1989.42,1984.28 ccw(c2073.7,2068.56) SD2.5@2073.7,1949.37 ; 2409.99,2129.99 ccw(c2424.98,2115) 2403.78,2115 cw(c2424.98,2115) 2409.99,2129.99 ; 2409.99,2129.99 cw(c2395,2144.98) 2395,2123.78 ccw(c2395,2144.98) 2409.99,2129.99 ; 3058.8,2315 ccw(c3058.8,2336.2) 3073.79,2321.21 cw(c3058.8,2336.2) 3058.8,2315 ; 3058.8,2315 cw(c3058.8,2293.8) 3073.79,2308.79 ccw(c3058.8,2293.8) 3058.8,2315 ; 3094.99,2300.01 ccw(c3080,2285.02) 3080,2306.22 cw(c3080,2285.02) 3094.99,2300.01 ; 3094.99,2300.01 cw(c3109.98,2315) 3088.78,2315 ccw(c3109.98,2315) 3094.99,2300.01 ; 3130,2265 cw(c3088.54,2265) 3111.45,2230.44 ccw(c3088.54,2265) 3130,2265 ; 1999.26,1974.44 ccw(c2025,2000.18) 2025,1963.78 cw(c2025,2000.18) 1999.26,1974.44 ; v1@2023.56,1950.14 ccw(c2073.7,2000.28) 2073.7,1929.37 cw(c2073.7,2000.28) v1@2023.56,1950.14 ; v1@2033.78,1955 ccw(c2070.18,1955) 2044.44,1929.26 cw(c2070.18,1955) v1@2033.78,1955 ; 2040.63,1933.07 ccw(c2073.7,1966.13) 2073.7,1919.37 cw(c2073.7,1966.13) 2040.63,1933.07 ; SD2.5@2057.7,1916 ccw(c2073.7,1931.99) 2073.7,1909.37 cw(c2073.7,1931.99) SD2.5@2057.7,1916 ; SD2.5@2088.38,1934.68 cw(c2109.39,1934.68) 2094.54,1949.54 ccw(c2109.39,1934.68) SD2.5@2088.38,1934.68 ; 2126.48,1981.48 cw(c2150,1957.95) 2150,1991.22 ccw(c2150,1957.95) 2126.48,1981.48 ; P3.12@3116.97,2222.11 ccw(c3100.89,2246.37) 3130,2246.37 cw(c3100.89,2246.37) P3.12@3116.97,2222.11 ; 3130,2257.14 ccw(c3172.14,2257.14) 3142.34,2227.34 cw(c3172.14,2257.14) 3130,2257.14
PA6: P3.13 P3.14 R29.2 SD2.7 U1.22 U5.7 U6.2 | length 7463.7
  Top Layer w6: U1.22@3047.71,2732.22 3047.71,2730.8 U1.22@3050.82,2730.8
  Top Layer w10: v1@1976,1618 1976,1291 2000,1267 2062,1267 2075,1280 ; R29.2@2057.79,1232.47 ccw(c2056.22,1248.92) 2068.97,1238.4 ; R29.2@2075,1232 2075,1280 ; U6.2@2075,1338.54 2075,1280 ; v1@2991,2750 2995.82,2754.82 3025.1,2754.82 U1.22@3047.71,2732.22 ; P3.13@3225,2110 P3.14@3225,2210 v1(3225,2647) ; 2075,1280 cw(c2012.52,1280) 2048.76,1229.11 ccw(c2012.52,1280) 2075,1280 ; 2075,1281.92 ccw(c2053.8,1281.92) 2068.79,1296.9 cw(c2053.8,1281.92) 2075,1281.92 ; 2075,1281.92 cw(c2096.19,1281.92) 2081.21,1296.9 ccw(c2096.19,1281.92) 2075,1281.92 ; 3225,2145.07 ccw(c3260.07,2145.07) 3235.27,2120.27 cw(c3260.07,2145.07) 3225,2145.07 ; 3225,2145.07 cw(c3189.93,2145.07) 3214.73,2120.27 ccw(c3189.93,2145.07) 3225,2145.07 ; 3225,2150.79 ccw(c3165.79,2150.79) 3207.66,2192.66 cw(c3165.79,2150.79) 3225,2150.79 ; 3225,2150.79 cw(c3284.21,2150.79) 3242.34,2192.66 ccw(c3284.21,2150.79) 3225,2150.79 ; 3225,2169.21 ccw(c3284.21,2169.21) 3242.34,2127.34 cw(c3284.21,2169.21) 3225,2169.21 ; 3225,2169.21 cw(c3165.79,2169.21) 3207.66,2127.34 ccw(c3165.79,2169.21) 3225,2169.21 ; 3225,2174.93 ccw(c3189.93,2174.93) 3214.73,2199.73 cw(c3189.93,2174.93) 3225,2174.93 ; 3225,2174.93 cw(c3260.07,2174.93) 3235.27,2199.73 ccw(c3260.07,2174.93) 3225,2174.93 ; 3225,2245.07 ccw(c3260.07,2245.07) 3235.27,2220.27 cw(c3260.07,2245.07) 3225,2245.07 ; 3225,2245.07 cw(c3189.93,2245.07) 3214.73,2220.27 ccw(c3189.93,2245.07) 3225,2245.07 ; 3225,2269.21 ccw(c3284.21,2269.21) 3242.34,2227.34 cw(c3284.21,2269.21) 3225,2269.21 ; 3225,2269.21 cw(c3165.79,2269.21) 3207.66,2227.34 ccw(c3165.79,2269.21) 3225,2269.21 ; 3225,2625.8 ccw(c3203.8,2625.8) 3218.79,2640.79 cw(c3203.8,2625.8) 3225,2625.8 ; 3225,2625.8 cw(c3246.2,2625.8) 3231.21,2640.79 ccw(c3246.2,2625.8) 3225,2625.8 ; v1@1971.58,1608.79 cw(c1960.9,1598.12) 1976,1598.12 ccw(c1960.9,1598.12) v1@1971.58,1608.79 ; 1976,1589.49 cw(c2003.29,1589.49) 1983.99,1608.79 ccw(c2003.29,1589.49) 1976,1589.49 ; R29.2@2054.56,1220.96 ccw(c2026.33,1260.6) 2075,1260.6 cw(c2026.33,1260.6) R29.2@2054.56,1220.96 ; R29.2@2060.37,1212.81 ccw(c2040.15,1241.2) 2075,1241.2 cw(c2040.15,1241.2) R29.2@2060.37,1212.81 ; v1@3001.21,2748.79 cw(c3015.77,2734.23) 3015.77,2754.82 ccw(c3015.77,2734.23) v1@3001.21,2748.79 ; v1@3001.21,2761.21 ccw(c3016.63,2776.63) 3016.63,2754.82 cw(c3016.63,2776.63) v1@3001.21,2761.21
  Bottom Layer w10: U5.7@1435,2270 1560,2270 1942,2270 2142,2070 2270.55,1941.45 2270.55,1900 2270.55,1860 ; v1@1976,1618 2751,1618 2850,1717 2850,1760 2890,1800 2915,1800 3045,1930 ; SD2.7@2252.46,1947.39 ccw(c2277.52,1954.1) SD2.7@2268.75,1929.68 ; v1@2991,2750 3094,2647 v1(3225,2647) ; v1@2995.56,2756.08 cw(c2984.71,2735.18) 3007.46,2741.28 ; P3.13@3225,2110 3225,1960 3195,1930 3045,1930 ; 1470.07,2270 ccw(c1470.07,2234.93) 1445.27,2259.73 cw(c1470.07,2234.93) 1470.07,2270 ; 1470.07,2270 cw(c1470.07,2305.07) 1445.27,2280.27 ccw(c1470.07,2305.07) 1470.07,2270 ; 1494.21,2270 ccw(c1494.21,2210.79) 1452.34,2252.66 cw(c1494.21,2210.79) 1494.21,2270 ; 1494.21,2270 cw(c1494.21,2329.21) 1452.34,2287.34 ccw(c1494.21,2329.21) 1494.21,2270 ; 2270.55,1860 ccw(c2235.43,1860) 2260.2,1884.9 cw(c2235.43,1860) 2270.55,1860 ; 2270.55,1860 cw(c2305.67,1860) 2280.9,1884.9 ccw(c2305.67,1860) 2270.55,1860 ; 2270.55,1860 2282.55,1848 2454,1848 2454,1880 2504,1930 3045,1930 ; 3203.8,2647 ccw(c3203.8,2668.2) 3218.79,2653.21 cw(c3203.8,2668.2) 3203.8,2647 ; 3203.8,2647 cw(c3203.8,2625.8) 3218.79,2640.79 ccw(c3203.8,2625.8) 3203.8,2647 ; 3225,2050.79 ccw(c3165.79,2050.79) 3207.66,2092.66 cw(c3165.79,2050.79) 3225,2050.79 ; 3225,2050.79 cw(c3284.21,2050.79) 3242.34,2092.66 ccw(c3284.21,2050.79) 3225,2050.79 ; 3225,2074.93 ccw(c3189.93,2074.93) 3214.73,2099.73 cw(c3189.93,2074.93) 3225,2074.93 ; 3225,2074.93 cw(c3260.07,2074.93) 3235.27,2099.73 ccw(c3260.07,2074.93) 3225,2074.93 ; v1@1983.99,1608.79 cw(c2006.22,1586.56) 2006.22,1618 ccw(c2006.22,1586.56) v1@1983.99,1608.79 ; v1@1983.99,1621.21 ccw(c1991.74,1628.95) 1991.74,1618 cw(c1991.74,1628.95) v1@1983.99,1621.21 ; 2240.7,1971.3 cw(c2204.08,1934.68) 2255.87,1934.68 ccw(c2204.08,1934.68) 2240.7,1971.3 ; 2257.03,1954.97 ccw(c2270.55,1968.49) 2270.55,1949.37 cw(c2270.55,1968.49) 2257.03,1954.97 ; SD2.7@2257.77,1954.23 cw(c2238.22,1934.68) 2265.86,1934.68 ccw(c2238.22,1934.68) SD2.7@2257.77,1954.23 ; v1@2993.78,2755 ccw(c3012.56,2755) 2999.28,2741.72 cw(c3012.56,2755) v1@2993.78,2755 ; v1@3003.78,2755 ccw(c3046.7,2755) 3016.35,2724.65 cw(c3046.7,2755) v1@3003.78,2755
  other v1: 1977.79,1615 2995,2755
PA7: P3.15 P3.16 R26.2 SD2.2 U1.23 U5.6 U6.5 | length 8873.2
  Top Layer w10: v1@1838.8,1975.24 cw(c1852.87,1972.36) 1849.15,1986.23 ; v1@1840.24,1973.8 ccw(c1837.36,1987.87) 1851.23,1984.15 ; v1@1845,1980 1860,1995 2060,1995 2175,1880 U6.5@2175,1531.46 ; U6.5@2173.83,1496.36 cw(c2184.67,1493.21) U6.5@2187.39,1504.18 ; U6.5@2174.01,1495.31 ccw(c2195.59,1510.96) 2191.4,1484.64 ; U6.5@2179.91,1488.75 cw(c2194.07,1467.8) 2198.88,1492.62 ; U6.5@2182.1,1501.18 ccw(c2223.22,1531.01) 2215.24,1480.84 ; U6.5@2182.27,1500.94 ccw(c2196.44,1510.52) 2193.2,1493.72 ; U6.5@2183.43,1493.57 cw(c2194.68,1490.3) 2197.49,1501.67 ; U6.5@2185.43,1534.57 2390,1330 ; R26.2@2445,1330 2390,1330 ; v1@3000,2815 3000,2811.17 3064.74,2746.43 U1.23@3064.74,2744.72 ; v1@3000.56,2821.09 cw(c2989.88,2800.32) 3012.43,2806.36 ; v1(3285,2649) 3285,2250 ; 3294.91,2234.74 ccw(c3334.67,2244) P3.16@3323.5,2204.74 ; 3300.26,2240.09 cw(c3291,2200.33) P3.16@3330.26,2211.5 ; P3.15@3325,2110 P3.16@3325,2210 3285,2250 ; 1854.99,1989.99 ccw(c1869.98,1975) 1848.78,1975 cw(c1869.98,1975) 1854.99,1989.99 ; 1854.99,1989.99 cw(c1840,2004.98) 1840,1983.78 ccw(c1840,2004.98) 1854.99,1989.99 ; 2175,1588.08 ccw(c2196.19,1588.08) 2181.21,1573.1 cw(c2196.19,1588.08) 2175,1588.08 ; 2175,1588.08 cw(c2153.8,1588.08) 2168.79,1573.1 ccw(c2153.8,1588.08) 2175,1588.08 ; 2390,1330 ccw(c2390,1374.01) 2421.32,1343.09 cw(c2390,1374.01) 2390,1330 ; 2390,1330 cw(c2390,1285.99) 2421.32,1316.91 ccw(c2390,1285.99) 2390,1330 ; 3285,2250 ccw(c3322.45,2287.45) 3324.19,2234.51 cw(c3322.45,2287.45) 3285,2250 ; 3285,2250 cw(c3247.55,2212.55) 3300.49,2210.81 ccw(c3247.55,2212.55) 3285,2250 ; 3285,2627.8 ccw(c3263.8,2627.8) 3278.79,2642.79 cw(c3263.8,2627.8) 3285,2627.8 ; 3285,2627.8 cw(c3306.2,2627.8) 3291.21,2642.79 ccw(c3306.2,2627.8) 3285,2627.8 ; 3301.31,2233.69 ccw(c3323.49,2255.87) 3324.52,2224.52 cw(c3323.49,2255.87) 3301.31,2233.69 ; 3301.31,2233.69 cw(c3279.13,2211.51) 3310.48,2210.48 ccw(c3279.13,2211.51) 3301.31,2233.69 ; 3325,2145.07 ccw(c3360.07,2145.07) 3335.27,2120.27 cw(c3360.07,2145.07) 3325,2145.07 ; 3325,2145.07 cw(c3289.93,2145.07) 3314.73,2120.27 ccw(c3289.93,2145.07) 3325,2145.07 ; 3325,2150.79 ccw(c3265.79,2150.79) 3307.66,2192.66 cw(c3265.79,2150.79) 3325,2150.79 ; 3325,2150.79 cw(c3384.21,2150.79) 3342.34,2192.66 ccw(c3384.21,2150.79) 3325,2150.79 ; 3325,2169.21 ccw(c3384.21,2169.21) 3342.34,2127.34 cw(c3384.21,2169.21) 3325,2169.21 ; 3325,2169.21 cw(c3265.79,2169.21) 3307.66,2127.34 ccw(c3265.79,2169.21) 3325,2169.21 ; 3325,2174.93 ccw(c3289.93,2174.93) 3314.73,2199.73 cw(c3289.93,2174.93) 3325,2174.93 ; 3325,2174.93 cw(c3360.07,2174.93) 3335.27,2199.73 ccw(c3360.07,2174.93) 3325,2174.93 ; U6.5@2175,1487.24 cw(c2175,1347.8) 2273.6,1446.4 ccw(c2175,1347.8) U6.5@2175,1487.24 ; U6.5@2175,1497.24 cw(c2175,1381.94) 2256.53,1463.47 ccw(c2175,1381.94) U6.5@2175,1497.24 ; U6.5@2175,1507.24 cw(c2175,1416.09) 2239.46,1480.54 ccw(c2175,1416.09) U6.5@2175,1507.24 ; U6.5@2175,1517.24 cw(c2175,1450.23) 2222.38,1497.62 ccw(c2175,1450.23) U6.5@2175,1517.24 ; U6.5@2175,1527.24 cw(c2175,1484.37) 2205.31,1514.69 ccw(c2175,1484.37) U6.5@2175,1527.24 ; U6.5@2175,1537.24 cw(c2175,1518.51) 2188.24,1531.76 ccw(c2175,1518.51) U6.5@2175,1537.24 ; v1@3008.78,2820 ccw(c3051.29,2820) 3021.23,2789.94 cw(c3051.29,2820) v1@3008.78,2820
  Bottom Layer w10: U5.6@1329.64,2168.9 ccw(c1367.3,2176.61) 1357.35,2139.48 ; U5.6@1329.64,2171.1 cw(c1367.3,2163.39) 1357.35,2200.52 ; U5.6@1336.1,2164.64 ccw(c1328.39,2202.3) 1365.52,2192.35 ; U5.6@1336.1,2175.36 cw(c1328.39,2137.7) 1365.52,2147.65 ; 1754.31,1969.89 ccw(c1800.36,1982.23) SD2.2@1780.39,1938.94 ; SD2.2@1759.83,1949.29 ccw(c1788.73,1957.03) SD2.2@1776.2,1929.86 ; SD2.2@1765.71,1942.03 ccw(c1748.38,1952.03) 1767.7,1957.21 ; SD2.2@1785,1940 SD2.2@1778.42,1946.58 ; v1@1835,1970 1835,1920 1815,1900 ; v1@3005,2820 3026,2820 3129.14,2716.86 3217.14,2716.86 v1(3285,2649) ; P3.16@3325,2210 3325,2285 3323.38,2285 3257.12,2351.26 1946.26,2351.26 1930,2335 1425,2335 1380,2290 1380,2215 U5.6@1335,2170 1385,2120 1605,2120 SD2.2@1778.42,1946.58 ; U5.6@1349.53,2170 cw(c1384.6,2170) 1359.8,2194.8 ; U5.6@1349.53,2170 ccw(c1384.6,2170) 1359.8,2145.2 ; U5.6@1349.53,2170 cw(c1384.6,2170) 1359.8,2194.8 ; U5.6@1349.53,2170 ccw(c1384.6,2170) 1359.8,2145.2 ; U5.6@1359.53,2170 cw(c1418.74,2170) 1376.87,2211.87 ; U5.6@1359.53,2170 ccw(c1418.74,2170) 1376.87,2128.13 ; U5.6@1359.53,2170 cw(c1418.74,2170) 1376.87,2211.87 ; U5.6@1359.53,2170 ccw(c1418.74,2170) 1376.87,2128.13 ; 1359.8,2145.2 ccw(c1335,2120.4) 1335,2155.47 cw(c1335,2120.4) 1359.8,2145.2 ; 1359.8,2194.8 cw(c1335,2219.6) 1335,2184.53 ccw(c1335,2219.6) 1359.8,2194.8 ; 1376.87,2128.13 ccw(c1335,2086.26) 1335,2145.47 cw(c1335,2086.26) 1376.87,2128.13 ; 1376.87,2211.87 cw(c1335,2253.74) 1335,2194.53 ccw(c1335,2253.74) 1376.87,2211.87 ; SD2.2@1778.42,1946.58 1778.42,1900 1815,1900 ; 1815,1900 ccw(c1815,1870.47) 1790.57,1887.06 cw(c1815,1870.47) 1815,1900 ; 3021.2,2820 ccw(c3021.2,2798.8) 3006.21,2813.79 cw(c3021.2,2798.8) 3021.2,2820 ; 3021.2,2820 cw(c3021.2,2841.2) 3006.21,2826.21 ccw(c3021.2,2841.2) 3021.2,2820 ; 3270.01,2663.99 ccw(c3285,2678.98) 3285,2657.78 cw(c3285,2678.98) 3270.01,2663.99 ; 3270.01,2663.99 cw(c3255.02,2649) 3276.22,2649 ccw(c3255.02,2649) 3270.01,2663.99 ; 3325,2245.07 ccw(c3360.07,2245.07) 3335.27,2220.27 cw(c3360.07,2245.07) 3325,2245.07 ; 3325,2245.07 cw(c3289.93,2245.07) 3314.73,2220.27 ccw(c3289.93,2245.07) 3325,2245.07 ; 3325,2269.21 ccw(c3384.21,2269.21) 3342.34,2227.34 cw(c3384.21,2269.21) 3325,2269.21 ; 3325,2269.21 cw(c3265.79,2269.21) 3307.66,2227.34 ccw(c3265.79,2269.21) 3325,2269.21 ; 1744.95,1980.05 cw(c1699.58,1934.68) 1763.74,1934.68 ccw(c1699.58,1934.68) 1744.95,1980.05 ; 1762.02,1962.98 cw(c1733.72,1934.68) 1773.74,1934.68 ccw(c1733.72,1934.68) 1762.02,1962.98 ; SD2.2@1788.81,1905.7 ccw(c1802.57,1919.46) 1802.57,1900 cw(c1802.57,1919.46) SD2.2@1788.81,1905.7 ; 1835,1941.73 cw(c1873.27,1941.73) 1846.21,1968.79 ccw(c1873.27,1941.73) 1835,1941.73
  other v1: 1840,1975 3000,2820
PA8: P6.1 P6.2 U1.41 | length 2373.1
  Top Layer w10: U1.41@3078.66,3078.79 3080.37,3078.79 3104.39,3102.81 3140.81,3102.81 v1(3145,3107) ; v1@3165,3245 v1(3165,3250) 3165,3279.3 3417,3531.3 3417,3721 3440,3744 3840,3744 3860,3724 ; P6.2@3860,3580 P6.1@3860,3680 3860,3724 ; 3165,3271.2 ccw(c3186.2,3271.2) 3171.21,3256.21 cw(c3186.2,3271.2) 3165,3271.2 ; 3165,3271.2 cw(c3143.8,3271.2) 3158.79,3256.21 ccw(c3143.8,3271.2) 3165,3271.2 ; 3860,3615.07 ccw(c3895.07,3615.07) 3870.27,3590.27 cw(c3895.07,3615.07) 3860,3615.07 ; 3860,3615.07 cw(c3824.93,3615.07) 3849.73,3590.27 ccw(c3824.93,3615.07) 3860,3615.07 ; 3860,3620.79 ccw(c3800.79,3620.79) 3842.66,3662.66 cw(c3800.79,3620.79) 3860,3620.79 ; 3860,3620.79 cw(c3919.21,3620.79) 3877.34,3662.66 ccw(c3919.21,3620.79) 3860,3620.79 ; 3860,3639.21 ccw(c3919.21,3639.21) 3877.34,3597.34 cw(c3919.21,3639.21) 3860,3639.21 ; 3860,3639.21 cw(c3800.79,3639.21) 3842.66,3597.34 ccw(c3800.79,3639.21) 3860,3639.21 ; 3860,3644.93 ccw(c3824.93,3644.93) 3849.73,3669.73 cw(c3824.93,3644.93) 3860,3644.93 ; 3860,3644.93 cw(c3895.07,3644.93) 3870.27,3669.73 ccw(c3895.07,3644.93) 3860,3644.93 ; 3860,3724 ccw(c3887.2,3724) 3872.9,3700.86 cw(c3887.2,3724) 3860,3724 ; 3860,3724 cw(c3832.8,3724) 3847.1,3700.86 ccw(c3832.8,3724) 3860,3724 ; 3113.69,3102.81 ccw(c3113.69,3138.31) 3138.79,3113.21 cw(c3113.69,3138.31) 3113.69,3102.81
  Bottom Layer w10: v1(3145,3107) 3165,3127 v1(3165,3250) ; 3159.99,3121.99 ccw(c3174.98,3107) 3153.78,3107 cw(c3174.98,3107) 3159.99,3121.99 ; 3159.99,3121.99 cw(c3145,3136.98) 3145,3115.78 ccw(c3145,3136.98) 3159.99,3121.99 ; 3165,3228.8 ccw(c3143.8,3228.8) 3158.79,3243.79 cw(c3143.8,3228.8) 3165,3228.8 ; 3165,3228.8 cw(c3186.2,3228.8) 3171.21,3243.79 ccw(c3186.2,3228.8) 3165,3228.8
PA9: P6.3 P6.4 P11.3 P12.4 U1.42 | length 5347.3
  Top Layer w6: U1.42@3045.03,3073 U1.42@3064.74,3092.71
  Top Layer w10: U1.42@3045.03,3073 3043.33,3073 3039.02,3068.69 2996.31,3068.69 2943.29,3121.71 2943.29,3293.29 3210,3560 v1(3210,3700) ; v1@3223.8,4020.24 cw(c3237.87,4017.36) 3234.15,4031.23 ; v1(3225,4020) P11.3@3310,4105 ; v1@3225.24,4018.8 ccw(c3222.36,4032.87) 3236.23,4029.15 ; 3289.48,4092.65 cw(c3326.61,4082.7) P11.3@3318.9,4120.36 ; 3297.65,4084.48 ccw(c3287.7,4121.61) P11.3@3325.36,4113.9 ; 3357.89,4546.51 ccw(c3338.74,4617.98) P12.4@3405.89,4586.9 ; 3378.53,4552.04 ccw(c3363.99,4606.29) P12.4@3414.97,4582.7 ; 3380.52,4562.57 ccw(c3371.1,4597.74) P12.4@3405.7,4586.41 ; P12.4@3425,4580 3385,4580 3210,4405 3210,4145 3250,4105 ; P6.4@3760,3580 P6.3@3760,3680 ; 3210,3678.8 ccw(c3188.8,3678.8) 3203.79,3693.79 cw(c3188.8,3678.8) 3210,3678.8 ; 3210,3678.8 cw(c3231.2,3678.8) 3216.21,3693.79 ccw(c3231.2,3678.8) 3210,3678.8 ; 3239.99,4034.99 ccw(c3254.98,4020) 3233.78,4020 cw(c3254.98,4020) 3239.99,4034.99 ; 3239.99,4034.99 cw(c3225,4049.98) 3225,4028.78 ccw(c3225,4049.98) 3239.99,4034.99 ; 3250,4105 ccw(c3250,4168.69) 3300.54,4129.93 cw(c3250,4168.69) 3250,4105 ; 3250,4105 P11.3@3310,4105 ; 3278.13,4073.13 ccw(c3236.26,4115) 3295.47,4115 cw(c3236.26,4115) 3278.13,4073.13 ; 3278.13,4073.13 cw(c3320,4031.26) 3320,4090.47 ccw(c3320,4031.26) 3278.13,4073.13 ; 3295.2,4090.2 ccw(c3270.4,4115) 3305.47,4115 cw(c3270.4,4115) 3295.2,4090.2 ; 3295.2,4090.2 cw(c3320,4065.4) 3320,4100.47 ccw(c3320,4065.4) 3295.2,4090.2 ; P11.3@3310,4105 3320,4105 P11.3@3310,4105 ; 3760,3615.07 ccw(c3795.07,3615.07) 3770.27,3590.27 cw(c3795.07,3615.07) 3760,3615.07 ; 3760,3615.07 cw(c3724.93,3615.07) 3749.73,3590.27 ccw(c3724.93,3615.07) 3760,3615.07 ; 3760,3620.79 ccw(c3700.79,3620.79) 3742.66,3662.66 cw(c3700.79,3620.79) 3760,3620.79 ; 3760,3620.79 cw(c3819.21,3620.79) 3777.34,3662.66 ccw(c3819.21,3620.79) 3760,3620.79 ; 3760,3639.21 ccw(c3819.21,3639.21) 3777.34,3597.34 cw(c3819.21,3639.21) 3760,3639.21 ; 3760,3639.21 cw(c3700.79,3639.21) 3742.66,3597.34 ccw(c3700.79,3639.21) 3760,3639.21 ; 3760,3644.93 ccw(c3724.93,3644.93) 3749.73,3669.73 cw(c3724.93,3644.93) 3760,3644.93 ; 3760,3644.93 cw(c3795.07,3644.93) 3770.27,3669.73 ccw(c3795.07,3644.93) 3760,3644.93 ; 3270.28,4105 ccw(c3270.28,4153.14) 3308.47,4123.84 cw(c3270.28,4153.14) 3270.28,4105 ; 3284.93,4105 cw(c3284.93,4079.93) 3302.66,4097.66 ccw(c3284.93,4079.93) 3284.93,4105 ; 3290.55,4105 ccw(c3290.55,4137.59) 3316.41,4117.76 cw(c3290.55,4137.59) 3290.55,4105 ; 3333.99,4528.99 cw(c3410,4452.97) 3410,4560.47 ccw(c3410,4452.97) 3333.99,4528.99 ; 3351.06,4546.06 cw(c3410,4487.12) 3410,4570.47 ccw(c3410,4487.12) 3351.06,4546.06 ; 3368.13,4563.13 cw(c3410,4521.26) 3410,4580.47 ccw(c3410,4521.26) 3368.13,4563.13
  Bottom Layer w10: v1(3210,3700) 3232.01,3722.01 3303,3722.01 3317,3708.01 3317,3660 3340,3637 3703,3637 P6.4@3760,3580 ; v1(3225,4020) 3225,3900 3410,3715 3410,3642 ; 3729.48,3602.35 ccw(c3766.61,3612.3) P6.4@3758.9,3574.64 ; 3737.65,3610.52 cw(c3727.7,3573.39) P6.4@3765.36,3581.1 ; 3224.99,3714.99 ccw(c3239.98,3700) 3218.78,3700 cw(c3239.98,3700) 3224.99,3714.99 ; 3224.99,3714.99 cw(c3210,3729.98) 3210,3708.78 ccw(c3210,3729.98) 3224.99,3714.99 ; 3225,3998.8 ccw(c3203.8,3998.8) 3218.79,4013.79 cw(c3203.8,3998.8) 3225,3998.8 ; 3225,3998.8 cw(c3246.2,3998.8) 3231.21,4013.79 ccw(c3246.2,3998.8) 3225,3998.8 ; 3718.13,3621.87 ccw(c3760,3663.74) 3760,3604.53 cw(c3760,3663.74) 3718.13,3621.87 ; 3718.13,3621.87 cw(c3676.26,3580) 3735.47,3580 ccw(c3676.26,3580) 3718.13,3621.87 ; 3735.2,3604.8 ccw(c3760,3629.6) 3760,3594.53 cw(c3760,3629.6) 3735.2,3604.8 ; 3735.2,3604.8 cw(c3710.4,3580) 3745.47,3580 ccw(c3710.4,3580) 3735.2,3604.8
PA10: P6.5 P6.6 P11.2 P12.3 U1.43 | length 4276.1
  Top Layer w10: U1.43@3050.83,3106.63 3052.53,3106.63 3079.16,3133.26 3282.98,3133.26 3660,3510.28 P6.6@3660,3580 P6.5@3660,3680 ; P11.2@3314.57,4015.69 cw(c3349.07,4011.32) 3340.07,4044.9 ; P11.2@3321.46,4009.73 ccw(c3310.16,4050.6) 3351.13,4039.63 ; 3378.77,4080.85 cw(c3392.64,4077.13) v1@3389.76,4091.2 ; 3380.85,4078.77 ccw(c3377.13,4092.64) v1@3391.2,4089.76 ; v1(3390,4090) 3335,4035 P11.2@3335,4020 ; v1@3433.8,4250.24 cw(c3447.87,4247.36) 3444.15,4261.23 ; v1(3435,4250) 3530,4345 3585,4345 3615,4375 3615,4510 3545,4580 ; v1@3435.24,4248.8 ccw(c3432.36,4262.87) 3446.23,4259.15 ; P12.3@3525,4580 3545,4580 ; P11.2@3335,4020 3320,4005 P11.2@3335,4020 ; 3375.01,4075.01 ccw(c3360.02,4090) 3381.22,4090 cw(c3360.02,4090) 3375.01,4075.01 ; 3375.01,4075.01 cw(c3390,4060.02) 3390,4081.22 ccw(c3390,4060.02) 3375.01,4075.01 ; 3449.99,4264.99 ccw(c3464.98,4250) 3443.78,4250 cw(c3464.98,4250) 3449.99,4264.99 ; 3449.99,4264.99 cw(c3435,4279.98) 3435,4258.78 ccw(c3435,4279.98) 3449.99,4264.99 ; 3545,4580 ccw(c3545,4563.4) 3530.87,4572.12 cw(c3545,4563.4) 3545,4580 ; 3545,4580 cw(c3545,4590.98) 3534.18,4589.13 ccw(c3545,4590.98) 3545,4580 ; 3660,3520.79 ccw(c3600.79,3520.79) 3642.66,3562.66 cw(c3600.79,3520.79) 3660,3520.79 ; 3660,3520.79 cw(c3719.21,3520.79) 3677.34,3562.66 ccw(c3719.21,3520.79) 3660,3520.79 ; 3660,3544.93 ccw(c3624.93,3544.93) 3649.73,3569.73 cw(c3624.93,3544.93) 3660,3544.93 ; 3660,3544.93 cw(c3695.07,3544.93) 3670.27,3569.73 ccw(c3695.07,3544.93) 3660,3544.93 ; 3660,3615.07 ccw(c3695.07,3615.07) 3670.27,3590.27 cw(c3695.07,3615.07) 3660,3615.07 ; 3660,3615.07 cw(c3624.93,3615.07) 3649.73,3590.27 ccw(c3624.93,3615.07) 3660,3615.07 ; 3660,3620.79 ccw(c3600.79,3620.79) 3642.66,3662.66 cw(c3600.79,3620.79) 3660,3620.79 ; 3660,3620.79 cw(c3719.21,3620.79) 3677.34,3662.66 ccw(c3719.21,3620.79) 3660,3620.79 ; 3660,3639.21 ccw(c3719.21,3639.21) 3677.34,3597.34 cw(c3719.21,3639.21) 3660,3639.21 ; 3660,3639.21 cw(c3600.79,3639.21) 3642.66,3597.34 ccw(c3600.79,3639.21) 3660,3639.21 ; 3660,3644.93 ccw(c3624.93,3644.93) 3649.73,3669.73 cw(c3624.93,3644.93) 3660,3644.93 ; 3660,3644.93 cw(c3695.07,3644.93) 3670.27,3669.73 ccw(c3695.07,3644.93) 3660,3644.93 ; P11.2@3320,4039.53 ccw(c3320,4086.67) 3353.34,4053.34 cw(c3320,4086.67) P11.2@3320,4039.53 ; P11.2@3334.53,4015 cw(c3381.67,4015) 3348.34,4048.34 ccw(c3381.67,4015) P11.2@3334.53,4015 ; P11.2@3344.53,4015 cw(c3415.81,4015) 3365.41,4065.41 ccw(c3415.81,4015) P11.2@3344.53,4015
  Bottom Layer w10: v1(3390,4090) 3435,4135 v1(3435,4250) ; 3629.48,3702.35 ccw(c3666.61,3712.3) P6.5@3658.9,3674.64 ; 3637.65,3710.52 cw(c3627.7,3673.39) P6.5@3665.36,3681.1 ; P6.5@3660,3680 3347,3993 ; 3347,3993 3320,3993 3347,3993 ; 3404.99,4104.99 ccw(c3419.98,4090) 3398.78,4090 cw(c3419.98,4090) 3404.99,4104.99 ; 3404.99,4104.99 cw(c3390,4119.98) 3390,4098.78 ccw(c3390,4119.98) 3404.99,4104.99 ; 3435,4228.8 ccw(c3413.8,4228.8) 3428.79,4243.79 cw(c3413.8,4228.8) 3435,4228.8 ; 3435,4228.8 cw(c3456.2,4228.8) 3441.21,4243.79 ccw(c3456.2,4228.8) 3435,4228.8 ; 3618.13,3721.87 ccw(c3660,3763.74) 3660,3704.53 cw(c3660,3763.74) 3618.13,3721.87 ; 3618.13,3721.87 cw(c3576.26,3680) 3635.47,3680 ccw(c3576.26,3680) 3618.13,3721.87 ; 3635.2,3704.8 ccw(c3660,3729.6) 3660,3694.53 cw(c3660,3729.6) 3635.2,3704.8 ; 3635.2,3704.8 cw(c3610.4,3680) 3645.47,3680 ccw(c3610.4,3680) 3635.2,3704.8 ; P11.2@3310,4003 3310,4015 P11.2@3310,4003